# Altium PCB MainBoard.PcbDoc
Units mil, origin at the board's own origin, x right, y up, seen from the top; angles counter-clockwise.
Board outline 4735.03 x 3165.03 mil, 2 copper layers (Top Layer, Bottom Layer); 56 components, 42 nets, 179 pads, 15 vias.
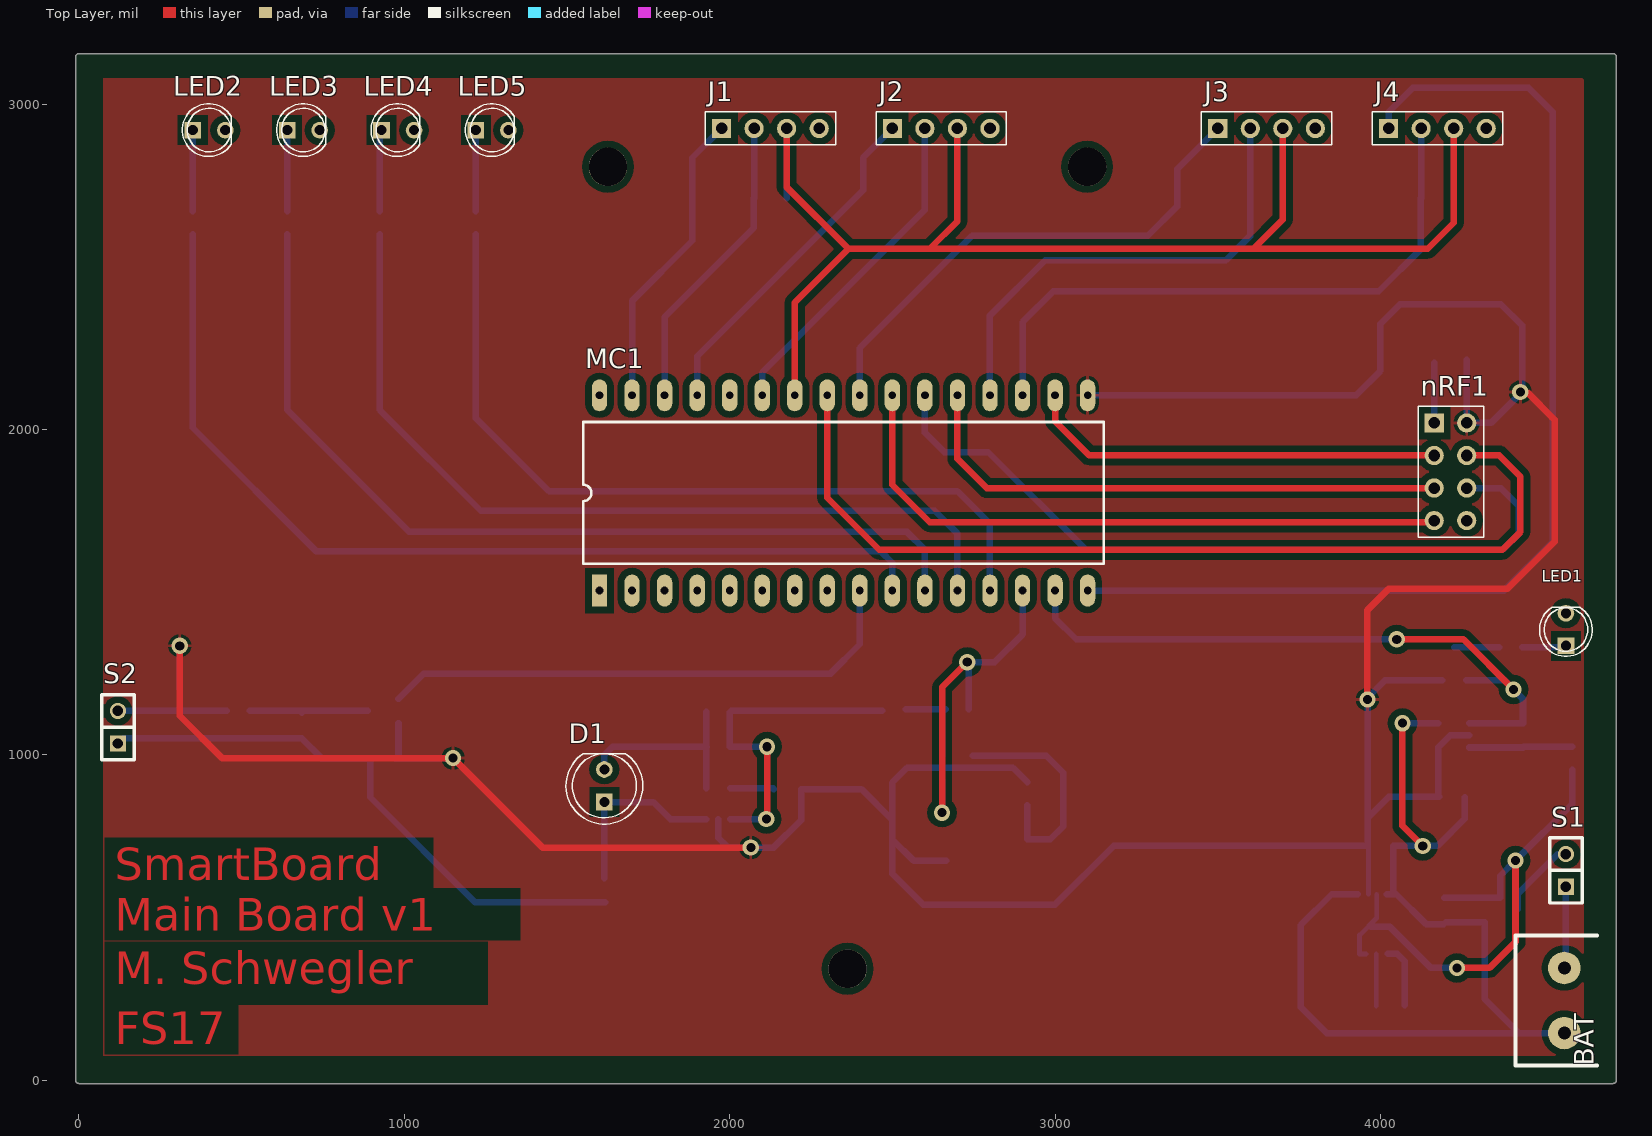
[diagram p0: Top Layer view]
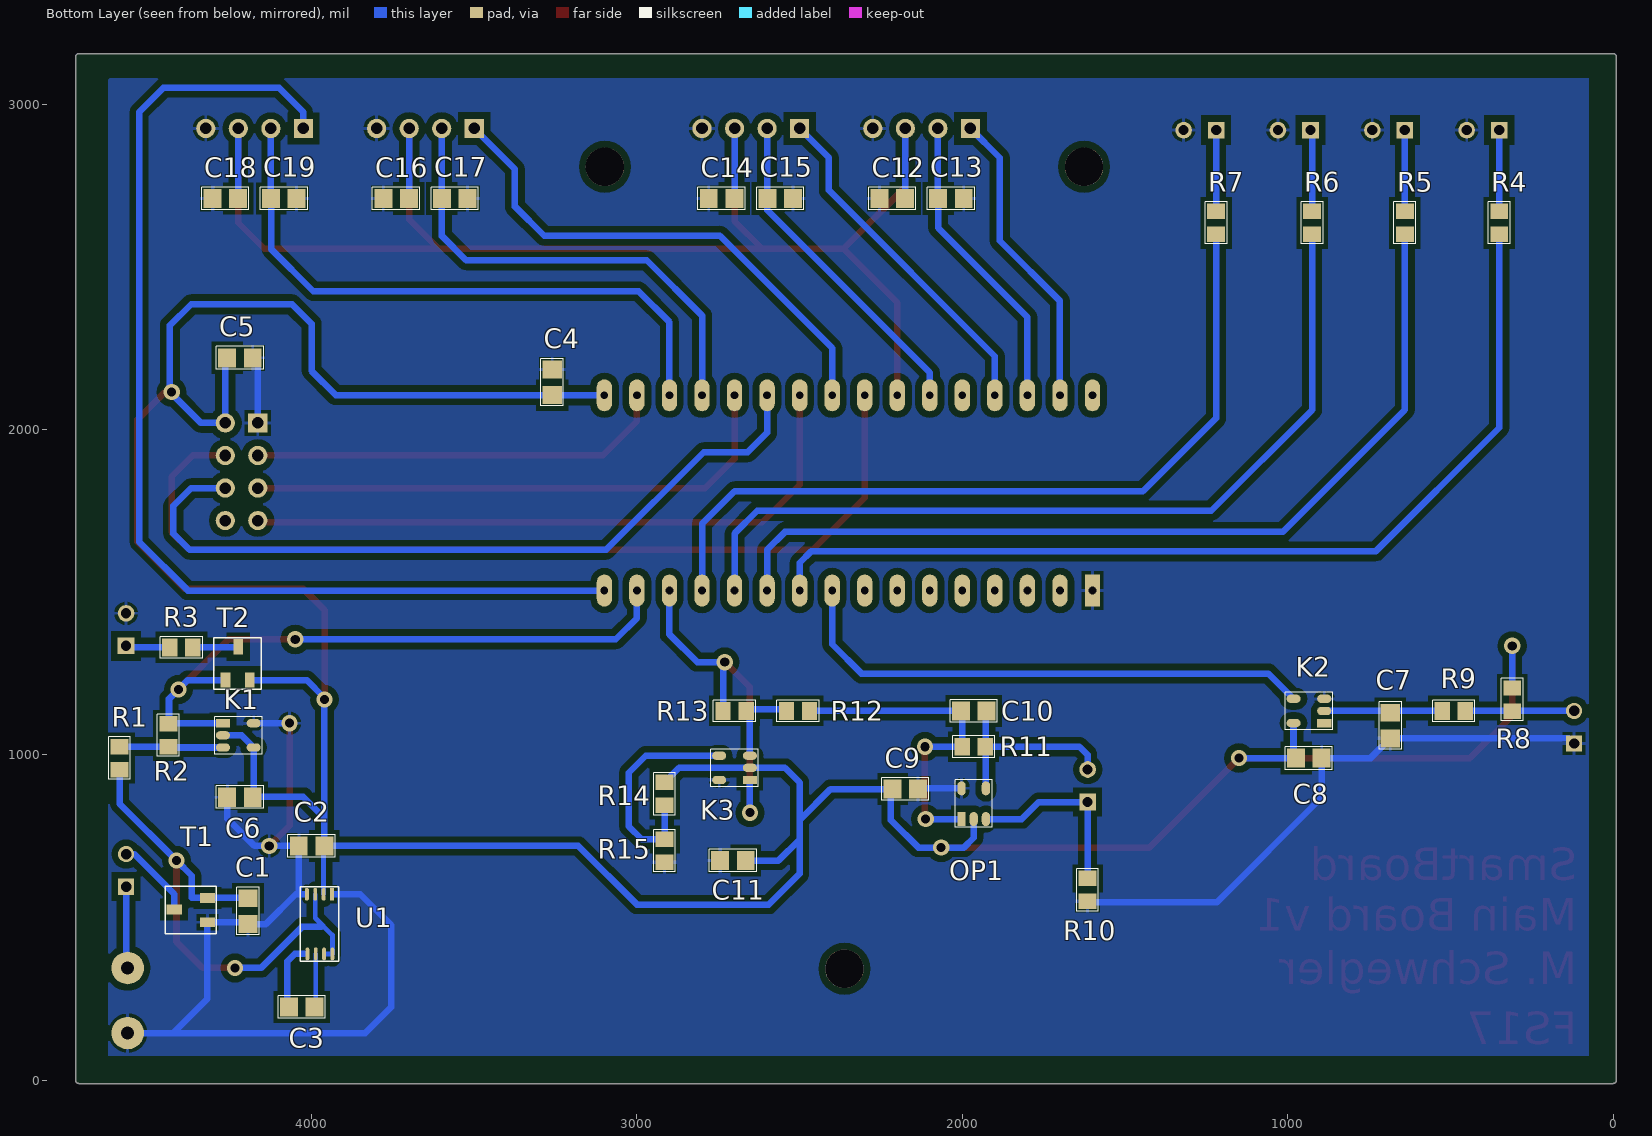
[diagram p1: Bottom Layer view, seen from below]
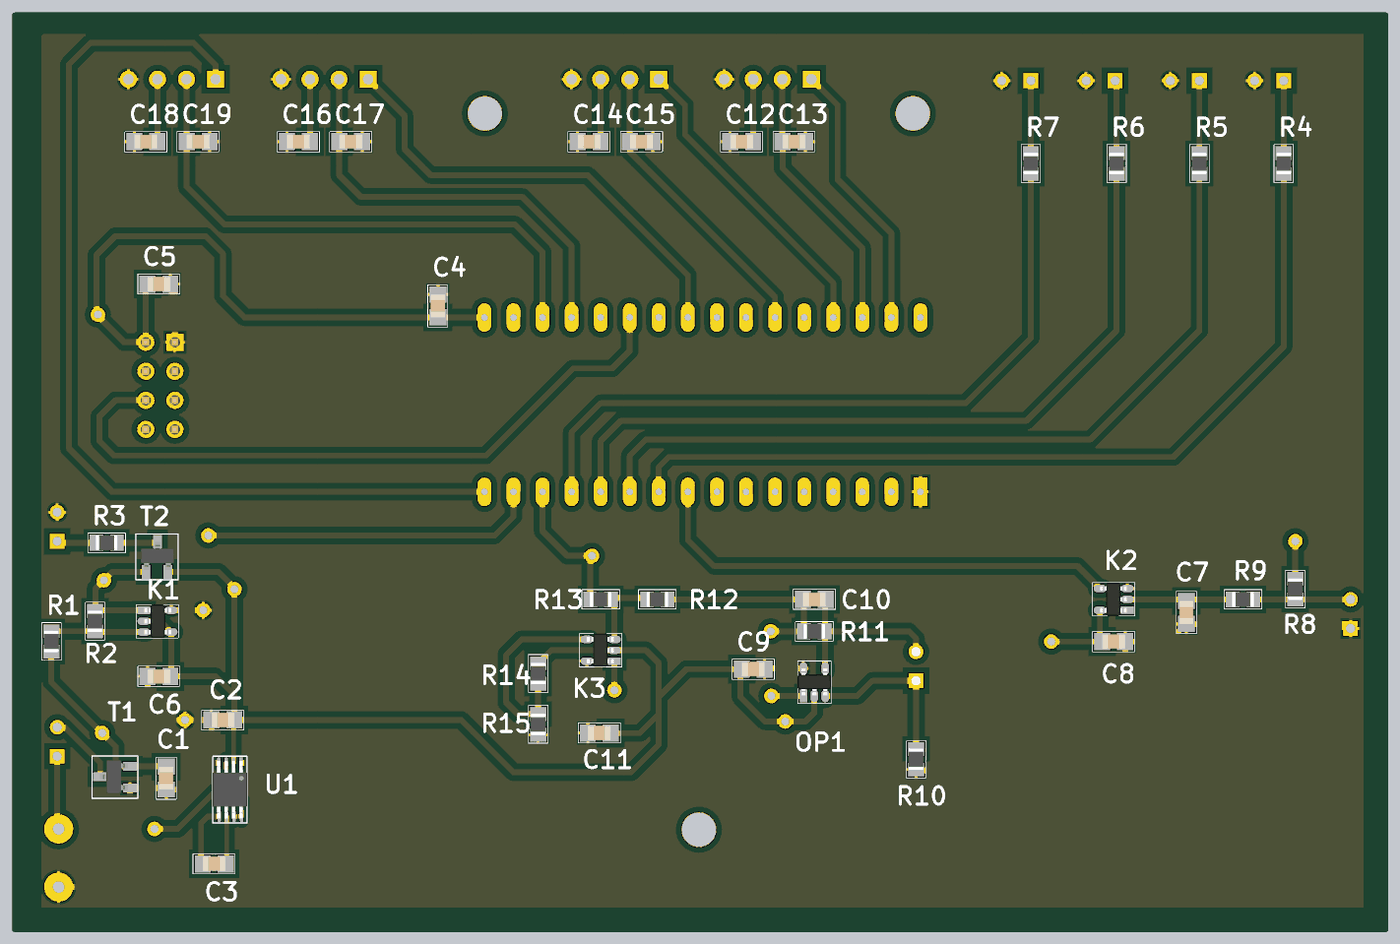
[diagram p2: 3D render of the assembled board from below, using the file's embedded part models]

## Layer stack, top to bottom
Top Solder: solder mask 0.4, Solder Resist, Dk 3.5
Top Layer: signal copper 1.4
Dielectric 1: dielectric 12.6, FR-4, Dk 4.8
Bottom Layer: signal copper 1.4
Bottom Solder: solder mask 0.4, Solder Resist, Dk 3.5

## Board outline
0,-10.01 cw(c0,0) -10.01,0 -10.01,3145 cw(c0,3145) 0,3155.02 4715,3155.02 cw(c4715,3145) 4725.02,3145 4725.02,0 cw(c4715,0) 4715,-10.01

## Design rules (kind name [scope] priority, off if disabled: settings)
Clearance [All] p1: gap=20
PolygonConnect [All] p1: connectstyle=Relief reliefconductorwidth=10 reliefentries=4 polygonreliefangle="90 Angle" airgapwidth=10
RoomDefinition MainBoard_Light [InComponentClass('MainBoard_Light')] p1: confinementstyle=ConfineIn formatcopy=TRUE lockcomponents=FALSE outline 1150,320 3715,320 3715,1280 1150,1280
RoomDefinition MainBoard_Power [InComponentClass('MainBoard_Power')] p2: confinementstyle=ConfineIn formatcopy=TRUE lockcomponents=FALSE outline 3590,0 4715,0 4715,895 3590,895
RoomDefinition MainBoard_MCU_RF [InComponentClass('MainBoard_MCU_RF')] p3: confinementstyle=ConfineIn formatcopy=TRUE lockcomponents=FALSE outline 0,0 4715,0 4715,3145 0,3145
RoomDefinition MainBoard_Interface_ProyimityDetector [InComponentClass('MainBoard_Interface_ProyimityDetector')] p4: confinementstyle=ConfineIn formatcopy=TRUE lockcomponents=FALSE outline 1870,2575 4715,2575 4715,3145 1870,3145
RoomDefinition MainBoard_HMI [InComponentClass('MainBoard_HMI')] p5: confinementstyle=ConfineIn formatcopy=TRUE lockcomponents=FALSE outline 0,740 4715,740 4715,3145 0,3145
RoutingVias [All] p1: holewidth=28 width=50 viastyle="Through Hole" minholewidth=28 minwidth=50 maxholewidth=28 maxwidth=50
SolderMaskExpansion [All] p1: expansion=4
UnpouredPolygon [All] p1: allowunpoured=FALSE
Width [All] p1: maxlimit=20 minlimit=20 preferedwidth=20
29 further rules are at their usual default settings.

## Classes and differential pairs
component class MainBoard_Light: C9 C10 C11 D1 K3 OP1 R10 R11 R12 R13 R14 R15
component class MainBoard_HMI: C6 C7 C8 K1 K2 LED1 LED2 LED3 LED4 LED5 R1 R2 R3 R4 R5 R6 R7 R8 R9 S2 T2
component class MainBoard_Interface_ProyimityDetector: C12 C13 C14 C15 C16 C17 C18 C19 J1 J2 J3 J4
component class MainBoard_MCU_RF: C4 C5 MC1 nRF1
component class MainBoard_Power: BAT C1 C2 C3 S1 T1 U1

## Components (designator, comment, footprint, x,y, rotation, side; value= is the part's Value field where it differs from the comment)
BAT "3 x AA" POWER2 4515,295 r0 top
C1 "10u" 0805_C 4195,520 r90 bottom
C2 "10u" 0805_C 4000,720 r180 bottom
C3 "1u" 0805_C 4030,225 r180 bottom
C4 "100n" 0805_C 3260,2145 r270 bottom
C5 "10u" 0805_C 4220,2220 r0 bottom
C6 "100n" 0805_C 4220,870 r0 bottom
C7 "100n" 0805_C 685,1090 r90 bottom
C8 "100n" 0805_C 935,990 r180 bottom
C9 "100n" 0805_C 2175,895 r180 bottom
C10 "33n" 0805_C 1965,1135 r0 bottom
C11 "100n" 0805_C 2705,675 r0 bottom
C12 "10p" 0805_C 2215,2710 r180 bottom
C13 "10p" 0805_C 2035,2710 r0 bottom
C14 "10p" 0805_C 2740,2710 r180 bottom
C15 "10p" 0805_C 2560,2710 r0 bottom
C16 "10p" 0805_C 3740,2710 r180 bottom
C17 "10p" 0805_C 3560,2710 r0 bottom
C18 "10p" 0805_C 4265,2710 r180 bottom
C19 "10p" 0805_C 4085,2710 r0 bottom
D1 "SFH 203" LED_THT_5mm_RM_2.54mm 1615,905 r90 top
J1 "Value" CON_THT_4P_RM2.54 2125,2925 r0 top
J2 "Value" CON_THT_4P_RM2.54 2650,2925 r0 top
J3 "Value" CON_THT_4P_RM2.54 3650,2925 r0 top
J4 "Value" CON_THT_4P_RM2.54 4175,2925 r0 top
K1 "MCP6561R" SOT23-5 4225,1060 r180 bottom
K2 "SN74LVC1G14" SOT23-5 935,1135 r0 bottom
K3 "MCP6561R" SOT23-5 2700,960 r0 bottom
LED1 "Value" LED_THT_3mm_RM_2.54mm 4570,1385 r90 top
LED2 "Value" LED_THT_3mm_RM_2.54mm 400,2920 r0 top
LED3 "Value" LED_THT_3mm_RM_2.54mm 690,2920 r0 top
LED4 "Value" LED_THT_3mm_RM_2.54mm 980,2920 r0 top
LED5 "Value" LED_THT_3mm_RM_2.54mm 1270,2920 r0 top
MC1 "TinyK20" DIP32 1600,1505 r90 top
nRF1 "nRF24L01+PA+LNA" CON_THT_2x4P_RM2.54_Stiftl 4215,1870 r270 top
OP1 "MCP6001R" SOT23-5 1965,850 r90 bottom
R1 "100k" 0805_R 4590,990 r270 bottom
R2 "3.3M" 0805_R 4440,1060 r270 bottom
R3 "1k" 0805_R 4400,1330 r0 bottom
R4 "1k" 0805_R 350,2635 r90 bottom
R5 "1k" 0805_R 640,2635 r90 bottom
R6 "1k" 0805_R 925,2635 r90 bottom
R7 "1k" 0805_R 1220,2635 r90 bottom
R8 "4.7k" 0805_R 310,1170 r270 bottom
R9 "220k" 0805_r 490,1135 r0 bottom
R10 "10M" 0805_R 1615,585 r270 bottom
R11 "10M" 0805_R 1965,1025 r180 bottom
R12 "100k" 0805_R 2505,1135 r180 bottom
R13 "3.3M" 0805_R 2700,1135 r180 bottom
R14 "220k" 0805_R 2915,880 r270 bottom
R15 "220k" 0805_R 2915,705 r270 bottom
S1 "SW SPST" SIP2 4570,595 r90 top
S2 "S2" SIP2 120,1035 r90 top
T1 "BSS84" SOT23-3 4375,525 r90 bottom
T2 "BSS84" SOT23-3 4225,1285 r180 bottom
U1 "MCP1252-33" MSOP8 3975,480 r0 bottom

## Footprints (in the part's own frame and the unit in brackets; to place one, negate y for a bottom-side part, rotate by r counter-clockwise, add the part's x,y. Pads: shape width x height; smd on the part's side, far side on the other; paste and mask are expansions set on the pad)
0805_C [mm] "Chip Capasitor - 0805 Medium"
  rect 1.4x1.5 smd: 1(-1,0) 2(1,0)
  silkscreen extent -1.85,-0.89 1.84,0.87, body extent -1,-0.63 1,0.62, height 0.59
0805_R [mm] "Chip Resistor - 0805 Normal"
  rect 1.2x1.4 smd: 1(-0.9,0) 2(0.9,0)
  silkscreen extent -1.65,-0.85 1.65,0.85, body extent -0.95,-0.65 0.95,0.65, height 0.63
0805_r [mm] "Chip Resistor - 0805 Normal"
  rect 1.2x1.4 smd: 1(-0.9,0) 2(0.9,0)
  silkscreen extent -1.65,-0.85 1.65,0.85, body extent -0.95,-0.65 0.95,0.65, height 0.63
CON_THT_2x4P_RM2.54_Stiftl [mm] "Connector; Header; 2x4Position"
  rect 1.5x1.5 hole 0.9: 1(-3.81,-1.27)
  round 1.5 hole 0.9: 2(-3.81,1.27) 3(-1.27,-1.27) 4(-1.27,1.27) 5(1.27,-1.27) 6(1.27,1.27) 7(3.81,-1.27) 8(3.81,1.27)
  silkscreen extent -5.1,-2.51 5.1,2.6, body extent -5.08,-2.51 5.08,2.57, height 8.57
CON_THT_4P_RM2.54 [mm] "Connector; Header; 6 Position"
  rect 1.5x1.5 hole 0.9: 1(-3.81,0)
  round 1.5 hole 0.9: 2(-1.27,0) 3(1.27,0) 4(3.81,0)
  silkscreen extent -5.08,-1.27 5.09,1.3, body extent -5.05,-1.3 5.11,1.24, height 9.27
DIP32 [mm]
  rect 2.5x1.2 hole 0.6: 1(0,0)
  oval 2.5x1.2 hole 0.6: 2(0,-2.54) 3(0,-5.08) 4(0,-7.62) 5(0,-10.16) 6(0,-12.7) 7(0,-15.24) 8(0,-17.78) 9(0,-20.32) 10(0,-22.86) 11(0,-25.4) 12(0,-27.94) 13(0,-30.48) 14(0,-33.02) 15(0,-35.56) 16(0,-38.1) 17(15.24,-38.1) 18(15.24,-35.56) 19(15.24,-33.02) 20(15.24,-30.48) 21(15.24,-27.94) 22(15.24,-25.4) 23(15.24,-22.86) 24(15.24,-20.32) 25(15.24,-17.78) 26(15.24,-15.24) 27(15.24,-12.7) 28(15.24,-10.16) 29(15.24,-7.62) 30(15.24,-5.08) 31(15.24,-2.54) 32(15.24,0)
  silkscreen extent 2.08,-39.37 13.16,1.27
LED_THT_3mm_RM_2.54mm [mm] "LED 5mm THT Case"
  rect 1.3x1.3 hole 0.8: 1(-1.27,0)
  round 1.3 hole 0.8: 2(1.27,0)
  silkscreen extent -2.09,-2.06 1.73,2.06
LED_THT_5mm_RM_2.54mm [mm] "LED 5mm THT Case"
  rect 1.3x1.3 hole 0.8: 1(-1.27,0)
  round 1.3 hole 0.8: 2(1.27,0)
  silkscreen extent -3,-3 2.52,3, body extent -2.98,-3.01 2.44,3.01, height 12.31
MSOP8 [mm]
  rect 0.3x1 smd: 1(-0.956,-2.332)
  oval 0.3x1 smd: 2(-0.306,-2.332) 3(0.344,-2.332) 4(0.994,-2.332) 5(0.956,2.332) 6(0.306,2.332) 7(-0.344,2.332) 8(-0.994,2.332)
  silkscreen extent -1.48,-2.93 1.52,2.9, body extent -1.48,-2.51 1.52,2.49, height 0.92
POWER2 [mil]
  round 100 hole 40: 1(50,50) 2(50,-150)
  silkscreen extent -100,-250 150,150
SIP2 [mil]
  rect 50x50 hole 32: 1(0,0)
  round 50 hole 32: 2(100,0)
  silkscreen extent -50,-50 150,50
SOT23-3 [mm]
  rect 0.76x1.2 smd: 1(-1,-1.4) 2(0.9,-1.4) 3(0,1.2)
  silkscreen extent -1.9,-2.1 1.8,1.9, body extent -1.46,-1.25 1.46,1.23, height 1
SOT23-5 [mm] "SOT23, 5-Leads, Body 2.9x1.6mm, Pitch 0.95mm, Lead Span 2.8mm, IPC Medium Density"
  rect 1.1x0.65 smd: 1(-1.2,0.95)
  oval 1.1x0.65 smd: 2(-1.2,0) 3(-1.2,-0.95) 4(1.2,-0.95) 5(1.2,0.95)
  silkscreen extent -1.85,-1.46 1.85,1.46, body extent -1.14,-1.46 1.2,1.46, height 1

## Part data
BAT: library part BATTERY
C1 C2 C3 C4 C5 C6 C7 C8 C9 C10 C11 C12 C13 C14 C15 C16 C17 C18 C19: library part C?, "Normaler Kondensator"
D1: library part Photo_Diode_1A_2K, "Photo_Diode_1A_2K"
J1 J2 J3 J4: library part CON_4P
K1 K3 OP1: library part OPAMP
K2: library part schmitt
LED1 LED2 LED3 LED4 LED5: library part LED
nRF1: library part Bluefruit
R1 R2 R3 R4 R5 R6 R7 R8 R9 R10 R11 R12 R13 R14 R15: library part R?, "Normaler Widerstand"
S2: library part SW-PB
T1: library part "MOSFET-P 1G,2D,3S (Diode)", "MOSFET-P 1G,2D,3S (Diode)"
T2: library part "MOSFET-P 1D,2G,3S", "MOSFET-P 1D,2G,3S"
U1: library part VOLTREG

## Free pads (board coordinates)
  round 118.11 hole 118.11: 0(1625.98,2807.09) 0(2362.2,342.52) 0(3098.43,2807.09)

## Via types
v1: diameter 50, hole 28, Top Layer to Bottom Layer, 15 vias

## Nets (pads, with @x,y where several pads share a name; then routed paths per layer and width w, separated by ;. In a path a pad name is that pad's centre, name@x,y a point inside that pad or via, vN(x,y) a via of type N, cw(c..) or ccw(c..) an arc to the next point about the centre after c; other vN are vias at no path point)
3V3: C2.2 C4.2 C5.2 C6.1 C8.1 C9.1 C11.1 K1.2 K1.4 K2.5 K3.2 MC1.17 nRF1.2 OP1.2 R8.1 R14.1 T2.2 U1.2 | length 10798.8
  Top Layer w20: v1(310,1335) 310,1120 440,990 v1(1150,990) 1425,715 v1(2065,715) ; v1(3960,1170) 3960,1445 4025,1510 4390,1510 4535,1655 4535,2030 4450,2115 v1(4430,2115)
  Bottom Layer w15: U1.2 C2.2@3962.95,717.68
  Bottom Layer w20: R8.1 v1(310,1335) ; C8.1 v1(1150,990) ; C8.1@982.24,997.87 K2.5 ; OP1.2 1965,745 1995,715 v1(2065,715) 2135,715 2219.37,799.37 2219.37,895 2405,895 2500,800 ; C11.1 2565,675 2500,740 ; R14.1 2870.43,960 K3.2 2545,960 2500,915 2500,800 ; MC1.17 C4.2@3259.37,2105 ; C4.2 3925.63,2105.63 4000,2180 4000,2325 4060,2385 4370,2385 4435,2320 4435,2115 4340,2020 nRF1.2 C5.2@4265,2214.37 ; C6.1@4177.76,872.87 K1.4 4215.16,1060 K1.2 ; C6.1@4180,870.63 4025.63,870.63 3960.63,805.63 ; T2.2 4014.88,1229.88 3960.63,1175.63 3960.63,805.63 ; 2500,740 2500,635 2595,540 3000,540 3180,720 C2.2 3960.63,805.63 ; 2500,740 2500,800
BAT: C1.2 R1.2 T1.2 U1.3 U1.7 U1.8 | length 1663.5
  Top Layer w20: v1(4235,345) 4335,345 4415,425 v1(4415,675)
  Bottom Layer w15: 3955,388.21 U1.8 3935.87,445.87 3988.54,498.54 U1.3
  Bottom Layer w20: 3970,472.2 4027.8,472.2 4155,345 v1(4235,345) ; C1.2@4196.06,560.43 T1.2 4368.19,560.43 4368.19,628.19 v1(4415,675) 4590,850 R1.2
BAT_KON: K1.1 MC1.15 R2.1 T2.1 | length 2022.8
  Top Layer w20: v1(4050,1355) 4255,1355 v1(4409.07,1200.93)
  Bottom Layer w20: MC1.15 3000,1420 3065,1355 v1(4050,1355) ; T2.1 4380.12,1229.88 v1(4409.07,1200.93) 4438.03,1171.97 4438.03,1097.4 K1.1
GND: BAT.2 C1.1 C2.1 C4.1 C5.1 C6.2 C7.1 C8.2 C9.2 C11.2 C12.1 C13.1 C14.1 C15.1 C16.1 C17.1 C18.1 C19.1 J1.4 J2.4 J3.4 J4.4 K1.5 K2.3 K3.5 LED1.2 LED2.2 LED3.2 LED4.2 LED5.2 MC1.1 nRF1.1 OP1.5 R10.2 R15.2 S2.1 T1.1 U1.1 U1.4 | length 5098
  Top Layer w20: v1(4067.6,1097.4) 4067.6,782.4 v1(4130,720)
  Bottom Layer w20: S2.1@135.63,1050.63 C7.1 745.63,990 C8.2 895.63,869.37 1218.46,546.54 R10.2@1617.76,546.54 ; OP1.5 2133.39,897.24 C9.2 ; 3930,571.79 3850,571.79 3755,476.79 3755,225 3835,145 4425,145 ; U1.4@4020,571.79 4048.21,571.79 4140,480 C1.1@4194.37,480 ; 4039.37,571.79 C2.1 v1(4130,720) 4175,720 4259.37,804.37 C6.2 ; v1(4067.6,1097.4) K1.5 ; nRF1.1 C5.1@4165,2204.37 ; C1.1@4200,485.63 T1.1 4319.88,250.12 4425,145 ; BAT.2@4575,145 4425,145
INITBUTTON: K2.4 MC1.9 | length 1652.2
  Bottom Layer w20: K2.4 1059.84,1250 2310,1250 2400,1340 MC1.9
LEDA: MC1.10 R4.1 | length 3001.5
  Bottom Layer w20: R4.1 350,2005 730,1625 2465,1625 2500,1590 MC1.10
LEDB: MC1.11 R5.1 | length 2802.7
  Bottom Layer w20: R5.1 640,2060 1015,1685 2545,1685 2600,1630 MC1.11
LEDC: MC1.12 R6.1 | length 2647
  Bottom Layer w20: R6.1 925,2060 1235,1750 2630,1750 2700,1680 MC1.12
LEDD: MC1.13 R7.1 | length 2484.2
  Bottom Layer w20: R7.1 1220,2035 1445,1810 2700,1810 2800,1710 MC1.13
LIGHTDETECTOR: K3.1 MC1.14 R13.1 | length 1074.9
  Top Layer w20: v1(2652.76,822.24) 2652.76,1207.76 v1(2730,1285)
  Bottom Layer w20: v1(2652.76,822.24) K3.1 ; v1(2730,1285) 2815,1285 2900,1370 MC1.14 ; R13.1@2735.43,1140 v1@2735.43,1279.57
NetBAT_1: BAT.1 S1.1 | length 252.1
  Bottom Layer w20: BAT.1 4570,350 S1.1
NetC3_1: C3.1 U1.5 | length 197.2
  Bottom Layer w20: 4021.79,388.21 4051.79,388.21 4075,365 C3.1@4075,230.63
NetC3_2: C3.2 U1.6 | length 159.6
  Bottom Layer w15: C3.2@3987.05,228.58 U1.6
NetC7_2: C7.2 K2.2 R9.2 | length 370.3
  Bottom Layer w20: R9.2 C7.2@679.37,1135 ; C7.2 C7.2@679.37,1135 ; K2.2 C7.2@679.37,1135
NetC10_1: C10.1 D1.2 OP1.4 R11.2 | length 605.7
  Bottom Layer w20: D1.2 1615,1000 1640,1025 R11.2@1927.6,1025 ; OP1.4 R11.2@1927.6,1025 ; C10.1@1927.6,1133.03 R11.2@1927.6,1025 ; R11.2 R11.2@1927.6,1025
NetC10_2: C10.2 OP1.1 R11.1 R12.2 | length 1016.2
  Top Layer w20: v1@2115,805 v1(2115,1025)
  Bottom Layer w20: C10.2@2000.43,1131.06 R11.1 v1(2115,1025) ; OP1.1 v1(2112.76,802.76) ; C10.2 R12.2
NetD1_1: D1.1 OP1.3 R10.1 | length 568.8
  Bottom Layer w20: R10.1 D1.1 1765,855 1817.24,802.76 OP1.3
NetK1_3: K1.3 R1.1 R2.2 | length 314.9
  Bottom Layer w20: K1.3 R2.2@4438.03,1022.6 ; R2.2@4440.87,1025.43 R1.1
NetK3_3: K3.3 R12.1 R13.2 | length 254.9
  Bottom Layer w20: R12.1@2540.43,1140 R13.2@2664.57,1140 ; K3.3 R13.2@2652.76,1128.19
NetK3_4: K3.4 R14.2 R15.1 | length 695
  Bottom Layer w20: K3.4 2972.6,997.4 3025,945 3025,780 2985.43,740.43 R15.1 R14.2
NetLED1_1: LED1.1 R3.2 | length 136.6
  Bottom Layer w20: R3.2 4565,1330 LED1.1
NetLED2_1: LED2.1 R4.2 | length 249.6
  Bottom Layer w20: R4.2 LED2.1
NetLED3_1: LED3.1 R5.2 | length 249.6
  Bottom Layer w20: R5.2 LED3.1
NetLED4_1: LED4.1 R6.2 | length 244.6
  Bottom Layer w20: R6.2 LED4.1@925,2915
NetLED5_1: LED5.1 R7.2 | length 249.6
  Bottom Layer w20: R7.2 LED5.1
NetR3_1: R3.1 T2.3 | length 137.3
  Bottom Layer w20: T2.3@4227.24,1330 R3.1
NetR8_2: R8.2 R9.1 S2.2 | length 334.6
  Bottom Layer w20: S2.2 R9.1
NetS1_2: S1.2 T1.3 | length 220.8
  Bottom Layer w20: T1.3 4422.24,572.24 S1.2@4545,695
NRF_CE: MC1.18 nRF1.3 | length 1288.5
  Top Layer w20: MC1.18 3000,2025 3105,1920 nRF1.3
NRF_CSN: MC1.25 nRF1.4 | length 2903.1
  Top Layer w20: MC1.25 2300,1790 2460,1630 4375,1630 4430,1685 4430,1855 4365,1920 nRF1.4
  Bottom Layer w20: MC1.25 MC1.25@2305,2100
NRF_MISO: MC1.23 nRF1.7 | length 1982.6
  Top Layer w20: MC1.23 2500,1830 2615,1715 nRF1.7@4160,1715
NRF_MOSI: MC1.22 nRF1.6 | length 2377.6
  Bottom Layer w20: MC1.22 2600,1990 2660,1930 2795,1930 3095,1630 4375,1630 4425,1680 4425,1765 4370,1820 nRF1.6
NRF_SCK: MC1.21 nRF1.5 | length 1697.3
  Top Layer w20: MC1.21 2700,1910 2790,1820 nRF1.5
POWERMODE: C12.2 C14.2 C16.2 C18.2 J1.3 J2.3 J3.3 J4.3 MC1.26 | length 4820.2
  Top Layer w20: J1.3 2175,2745 2365,2555 ; MC1.26 2200,2390 2365,2555 ; J2.3 2700,2640 2615,2555 ; J3.3 3700,2645 3610,2555 ; J4.3 4225,2635 4145,2555 3610,2555 ; 2365,2555 2615,2555 ; 2615,2555 3610,2555
  Bottom Layer w20: C12.2@2175,2710.63 J1.3 ; C14.2@2700,2710.63 J2.3 ; C16.2@3700,2710.63 J3.3 ; C18.2@4225,2710.63 J4.3
PROXIMITYDETECTORA: C13.2 J1.2 MC1.30 | length 933
  Bottom Layer w20: MC1.30 1800,2345 2074.37,2619.37 C13.2 ; C13.2@2075,2710.63 J1.2
PROXIMITYDETECTORAENABLE: J1.1 MC1.31 | length 933.9
  Bottom Layer w20: MC1.31 1700,2395 1885,2580 1885,2835 J1.1
PROXIMITYDETECTORB: C15.2 J2.2 MC1.27 | length 1026.2
  Bottom Layer w20: MC1.27 2100,2175 2599.37,2674.37 C15.2 ; C15.2@2600,2710.63 J2.2
PROXIMITYDETECTORBENABLE: J2.1 MC1.29 | length 1068.5
  Bottom Layer w20: MC1.29 1900,2225 2410,2735 2410,2835 J2.1
PROXIMITYDETECTORC: C17.2 J3.2 MC1.20 | length 1475.6
  Bottom Layer w20: MC1.20 2800,2350 2970,2520 3525,2520 3599.37,2594.37 C17.2 ; C17.2@3600,2710.63 J3.2
PROXIMITYDETECTORCENABLE: J3.1 MC1.24 | length 1592
  Bottom Layer w20: MC1.24 2400,2250 2745,2595 3285,2595 3375,2685 3375,2800 J3.1
PROXIMITYDETECTORD: C19.2 J4.2 MC1.19 | length 1912.3
  Bottom Layer w20: MC1.19 2900,2330 2995,2425 3995,2425 4124.37,2554.37 C19.2 ; C19.2@4125,2710.63 J4.2
PROXIMITYDETECTORDENABLE: J4.1 MC1.16 | length 3429.3
  Bottom Layer w20: MC1.16 4380,1505 4530,1655 4530,2975 4455,3050 4100,3050 4025,2975 J4.1
pads on no net: K2.1 MC1.2 MC1.3 MC1.4 MC1.5 MC1.6 MC1.7 MC1.8 MC1.28 MC1.32 nRF1.8

## Polygon pours and split planes (outlines as drawn)
3V3 on Top Layer "Top Layer-No Net" (solid, pour order 4): 75,75 4625,75 4625,3075 4620,3080 75,3080
GND on Bottom Layer "Bottom Layer-No Net" (solid, pour order 3): 75,75 4625,75 4625,3075 4620,3080 75,3080

## Other copper
Top Layer:
  text "SmartBoard" at 110,615 h100
  text "Main Board v1" at 110,460 h100
  text "M. Schwegler" at 110,295 h100
  text "FS17" at 110,110 h100

## Silkscreen, mask and mechanical layers (free items; w line width, h text height)
Mechanical 1:
  lines w20: 0,0 4715,0 4715,3145 0,3145 0,0